# Altium PCB LXF1768.PcbDoc (part 3 of 5)
Units mil, origin at the board's own origin, x right, y up, seen from the top; angles counter-clockwise.
Board outline 3899 x 3079 mil, 2 copper layers (Top Layer, Bottom Layer); 52 components, 108 nets, 388 pads, 52 vias.
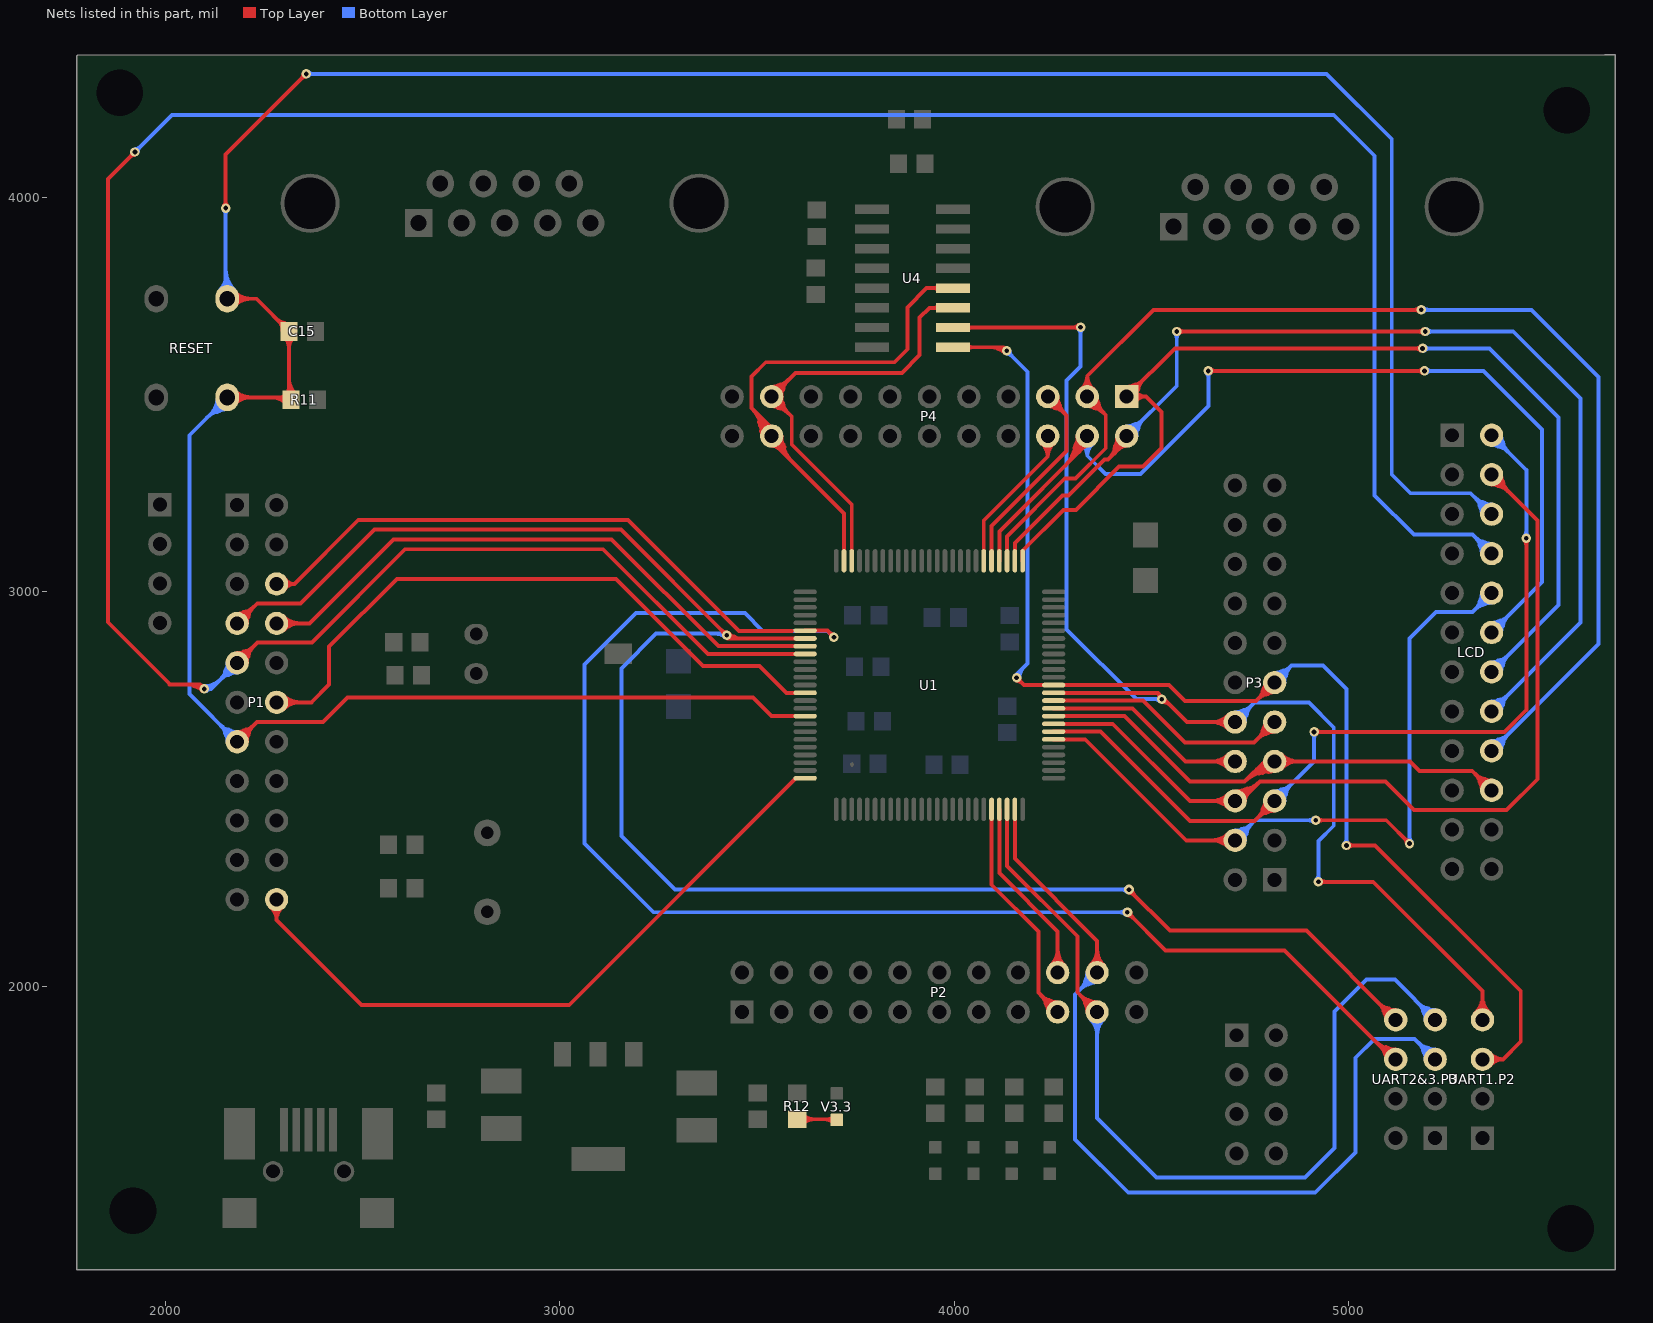
[diagram p3: the nets of this part, all layers, seen from the top]

## Via types
v1: diameter 25, hole 12, Top Layer to Bottom Layer, 27 vias
v2: diameter 24, hole 12, Top Layer to Bottom Layer, 25 vias

## Nets (pads, with @x,y where several pads share a name; then routed paths per layer and width w, separated by ;. In a path a pad name is that pad's centre, name@x,y a point inside that pad or via, vN(x,y) a via of type N, cw(c..) or ccw(c..) an arc to the next point about the centre after c; other vN are vias at no path point) (continued)
NetR12_2: R12.2 V3.3.1 | length 308.5
  Top Layer w10: R12.2@3602,1663.07 3700.46,1663.07 V3.3.1@3702,1661.54 ; 3644.17,1663.07 cw(c3644.17,1703.28) 3615.74,1674.85 ccw(c3644.17,1703.28) 3644.17,1663.07 ; 3644.17,1663.07 ccw(c3644.17,1622.87) 3615.74,1651.3 cw(c3644.17,1622.87) 3644.17,1663.07 ; 3672.34,1663.07 cw(c3672.34,1631.88) 3694.4,1653.94 ccw(c3672.34,1631.88) 3672.34,1663.07 ; 3679.76,1663.07 ccw(c3679.76,1683.78) 3694.4,1669.14 cw(c3679.76,1683.78) 3679.76,1663.07
NRST: C15.1 LCD.6 P1.13 R11.1 RESET.1 U1.17 | length 10827.2
  Top Layer w10: v2(2153,3973) 2153,4109 v2(2357,4313) ; RESET.1@2157,3493 2313,3493 C15.1@2313,3659 ; RESET.1@2157,3743 2231,3743 C15.1@2314,3660 ; P1.13@2176.64,2621.1 cw(c2214.3,2613.39) 2204.35,2650.52 ; P1.13@2182,2620 2232,2670 2400,2670 2462,2732 3490,2732 3536.96,2685.04 U1.17@3622,2685.04 ; P1.13@2183.1,2614.64 ccw(c2175.39,2652.3) 2212.52,2642.35 ; C15.1@2297.33,3683.09 cw(c2290.08,3656.06) C15.1@2317.25,3662.77 ; 2153,3989.9 cw(c2136.1,3989.9) 2148.05,3977.95 ccw(c2136.1,3989.9) 2153,3989.9 ; 2153,3989.9 ccw(c2169.9,3989.9) 2157.95,3977.95 cw(c2169.9,3989.9) 2153,3989.9 ; 2193.21,3493 cw(c2193.21,3529.21) 2167.61,3503.61 ccw(c2193.21,3529.21) 2193.21,3493 ; 2193.21,3493 ccw(c2193.21,3456.79) 2167.61,3482.39 cw(c2193.21,3456.79) 2193.21,3493 ; 2193.21,3743 cw(c2193.21,3779.21) 2167.61,3753.61 ccw(c2193.21,3779.21) 2193.21,3743 ; 2193.21,3743 ccw(c2193.21,3706.79) 2167.61,3732.39 cw(c2193.21,3706.79) 2193.21,3743 ; 2206.8,2644.8 cw(c2182,2669.6) 2182,2634.53 ccw(c2182,2669.6) 2206.8,2644.8 ; 2206.8,2644.8 ccw(c2231.6,2620) 2196.53,2620 cw(c2231.6,2620) 2206.8,2644.8 ; 2217.36,3493 cw(c2217.36,3553.36) 2174.68,3510.68 ccw(c2217.36,3553.36) 2217.36,3493 ; 2217.36,3493 ccw(c2217.36,3432.64) 2174.68,3475.32 cw(c2217.36,3432.64) 2217.36,3493 ; 2217.36,3743 cw(c2217.36,3803.36) 2174.68,3760.68 ccw(c2217.36,3803.36) 2217.36,3743 ; 2217.36,3743 ccw(c2217.36,3682.64) 2174.68,3725.32 cw(c2217.36,3682.64) 2217.36,3743 ; 2223.87,2661.87 cw(c2182,2703.74) 2182,2644.53 ccw(c2182,2703.74) 2223.87,2661.87 ; 2223.87,2661.87 ccw(c2265.74,2620) 2206.53,2620 cw(c2265.74,2620) 2223.87,2661.87 ; R11.1@2307.22,3500.74 cw(c2288.53,3519.44) 2288.53,3493 ccw(c2288.53,3519.44) R11.1@2307.22,3500.74 ; R11.1@2307.22,3500.74 ccw(c2293.28,3514.69) 2313,3514.69 cw(c2293.28,3514.69) R11.1@2307.22,3500.74 ; 2345.05,4301.05 cw(c2357,4289.1) 2357,4306 ccw(c2357,4289.1) 2345.05,4301.05 ; 2345.05,4301.05 ccw(c2333.1,4313) 2350,4313 cw(c2333.1,4313) 2345.05,4301.05 ; 2269.06,3493 cw(c2269.06,3439.03) 2307.22,3477.19 ccw(c2269.06,3439.03) 2269.06,3493 ; 2282.21,3691.79 ccw(c2314,3723.58) 2314,3678.62 cw(c2314,3723.58) 2282.21,3691.79 ; 2286.96,3687.04 cw(c2261.89,3661.97) 2297.35,3661.97 ccw(c2261.89,3661.97) 2286.96,3687.04 ; 2293.2,3493 cw(c2293.2,3463.17) 2314.3,3484.26 ccw(c2293.2,3463.17) 2293.2,3493 ; C15.1@2302.22,3646.26 cw(c2276.21,3620.24) 2313,3620.24 ccw(c2276.21,3620.24) C15.1@2302.22,3646.26 ; 2313,3519.52 ccw(c2349.55,3519.52) 2323.7,3493.67 cw(c2349.55,3519.52) 2313,3519.52 ; 2313,3543.66 ccw(c2373.69,3543.66) 2330.78,3500.74 cw(c2373.69,3543.66) 2313,3543.66 ; 2313,3615.41 cw(c2356.62,3615.41) 2325.78,3646.26 ccw(c2356.62,3615.41) 2313,3615.41
  Bottom Layer w10: 2126.28,3466.67 cw(c2160.92,3457.39) RESET.1@2156.36,3492.96 ; 2130.97,3456.02 ccw(c2119.65,3498.27) RESET.1@2161.82,3486.67 ; 2151.48,2642.35 ccw(c2188.61,2652.3) P1.13@2180.9,2614.64 ; v2(2153,3973) 2153,3747 RESET.1@2157,3743 ; RESET.1@2157,3493 2061,3397 2061,2741 P1.13@2182,2620 ; 2159.65,2650.52 cw(c2149.7,2613.39) P1.13@2187.36,2621.1 ; v2(2357,4313) 4944,4313 5109,4148 5109,3298 5157,3250 5309,3250 LCD.6@5362,3197 ; 5331.48,3219.35 ccw(c5368.61,3229.3) LCD.6@5360.9,3191.64 ; 5339.65,3227.52 cw(c5329.7,3190.39) LCD.6@5367.36,3198.1 ; 2140.13,2661.87 cw(c2098.26,2620) 2157.47,2620 ccw(c2098.26,2620) 2140.13,2661.87 ; 2140.13,2661.87 ccw(c2182,2703.74) 2182,2644.53 cw(c2182,2703.74) 2140.13,2661.87 ; 2153,3956.1 cw(c2169.9,3956.1) 2157.95,3968.05 ccw(c2169.9,3956.1) 2153,3956.1 ; 2153,3956.1 ccw(c2136.1,3956.1) 2148.05,3968.05 cw(c2136.1,3956.1) 2153,3956.1 ; 2157.2,2644.8 cw(c2132.4,2620) 2167.47,2620 ccw(c2132.4,2620) 2157.2,2644.8 ; 2157.2,2644.8 ccw(c2182,2669.6) 2182,2634.53 cw(c2182,2669.6) 2157.2,2644.8 ; 2373.9,4313 cw(c2373.9,4329.9) 2361.95,4317.95 ccw(c2373.9,4329.9) 2373.9,4313 ; 2373.9,4313 ccw(c2373.9,4296.1) 2361.95,4308.05 cw(c2373.9,4296.1) 2373.9,4313 ; 5320.13,3238.87 cw(c5278.26,3197) 5337.47,3197 ccw(c5278.26,3197) 5320.13,3238.87 ; 5320.13,3238.87 ccw(c5362,3280.74) 5362,3221.53 cw(c5362,3280.74) 5320.13,3238.87 ; 5337.2,3221.8 cw(c5312.4,3197) 5347.47,3197 ccw(c5312.4,3197) 5337.2,3221.8 ; 5337.2,3221.8 ccw(c5362,3246.6) 5362,3211.53 cw(c5362,3246.6) 5337.2,3221.8 ; 2105.79,3441.79 cw(c2157,3390.57) 2157,3463 ccw(c2157,3390.57) 2105.79,3441.79 ; 2117.86,3453.86 ccw(c2083.72,3488) 2132,3488 cw(c2083.72,3488) 2117.86,3453.86 ; 2122.86,3458.86 cw(c2157,3424.72) 2157,3473 ccw(c2157,3424.72) 2122.86,3458.86 ; RESET.1@2139.32,3765.68 ccw(c2106.3,3798.7) 2153,3798.7 cw(c2106.3,3798.7) RESET.1@2139.32,3765.68 ; 2153,3793.87 ccw(c2202.87,3793.87) 2167.61,3758.61 cw(c2202.87,3793.87) 2153,3793.87 ; 2153,3818.01 ccw(c2227.01,3818.01) 2174.68,3765.68 cw(c2227.01,3818.01) 2153,3818.01
NRSTOUT: P1.12 U1.14 | length 1941.8
  Top Layer w10: P1.12@2282,2720 2370,2720 2415,2765 2415,2861 2587,3033 3142,3033 3363,2812 3506.32,2812 3574.23,2744.09 U1.14@3622,2744.09 ; 2317.07,2720 cw(c2317.07,2755.07) 2292.27,2730.27 ccw(c2317.07,2755.07) 2317.07,2720 ; 2317.07,2720 ccw(c2317.07,2684.93) 2292.27,2709.73 cw(c2317.07,2684.93) 2317.07,2720 ; 2341.21,2720 cw(c2341.21,2779.21) 2299.34,2737.34 ccw(c2341.21,2779.21) 2341.21,2720 ; 2341.21,2720 ccw(c2341.21,2660.79) 2299.34,2702.66 cw(c2341.21,2660.79) 2341.21,2720
P0_0: P2.17 U1.46 | length 964.5
  Top Layer w10: U1.46@4094.44,2448.82 4094.44,2257.56 4213,2139 4213,1984 P2.17@4262,1935 ; 4231.48,1957.35 ccw(c4268.61,1967.3) P2.17@4260.9,1929.64 ; 4239.65,1965.52 cw(c4229.7,1928.39) P2.17@4267.36,1936.1 ; 4220.13,1976.87 cw(c4178.26,1935) 4237.47,1935 ccw(c4178.26,1935) 4220.13,1976.87 ; 4220.13,1976.87 ccw(c4262,2018.74) 4262,1959.53 cw(c4262,2018.74) 4220.13,1976.87 ; 4237.2,1959.8 cw(c4212.4,1935) 4247.47,1935 ccw(c4212.4,1935) 4237.2,1959.8 ; 4237.2,1959.8 ccw(c4262,1984.6) 4262,1949.53 cw(c4262,1984.6) 4237.2,1959.8
P0_1: P2.18 U1.47 | length 771.3
  Top Layer w10: U1.47@4114.12,2448.82 4114.12,2286.88 4262,2139 P2.18@4262,2035 ; 4262,2070.07 cw(c4226.93,2070.07) 4251.73,2045.27 ccw(c4226.93,2070.07) 4262,2070.07 ; 4262,2070.07 ccw(c4297.07,2070.07) 4272.27,2045.27 cw(c4297.07,2070.07) 4262,2070.07 ; 4262,2094.21 cw(c4202.79,2094.21) 4244.66,2052.34 ccw(c4202.79,2094.21) 4262,2094.21 ; 4262,2094.21 ccw(c4321.21,2094.21) 4279.34,2052.34 cw(c4321.21,2094.21) 4262,2094.21
P0_2: P4.19 U1.98 U4.11 | length 1922.9
  Top Layer w10: P4.19@3531.64,3493.9 ccw(c3569.3,3501.61) 3559.35,3464.48 ; P4.19@3531.64,3496.1 cw(c3569.3,3488.39) 3559.35,3525.52 ; P4.19@3538.1,3489.64 ccw(c3530.39,3527.3) 3567.52,3517.35 ; P4.19@3538.1,3500.36 cw(c3530.39,3462.7) 3567.52,3472.65 ; U1.98@3740.11,3078.74 3740.11,3221.89 3588,3374 3588,3444 P4.19@3537,3495 3597,3555 3867,3555 3912,3600 3912,3695 3937,3720 U4.11@3996.36,3720 ; P4.19@3551.53,3495 cw(c3586.6,3495) 3561.8,3519.8 ; P4.19@3551.53,3495 ccw(c3586.6,3495) 3561.8,3470.2 ; P4.19@3551.53,3495 cw(c3586.6,3495) 3561.8,3519.8 ; P4.19@3551.53,3495 ccw(c3586.6,3495) 3561.8,3470.2 ; P4.19@3561.53,3495 cw(c3620.74,3495) 3578.87,3536.87 ; P4.19@3561.53,3495 ccw(c3620.74,3495) 3578.87,3453.13 ; P4.19@3561.53,3495 cw(c3620.74,3495) 3578.87,3536.87 ; P4.19@3561.53,3495 ccw(c3620.74,3495) 3578.87,3453.13 ; 3561.8,3470.2 ccw(c3537,3445.4) 3537,3480.47 cw(c3537,3445.4) 3561.8,3470.2 ; 3561.8,3519.8 cw(c3537,3544.6) 3537,3509.53 ccw(c3537,3544.6) 3561.8,3519.8 ; 3578.87,3453.13 ccw(c3537,3411.26) 3537,3470.47 cw(c3537,3411.26) 3578.87,3453.13 ; 3578.87,3536.87 cw(c3537,3578.74) 3537,3519.53 ccw(c3537,3578.74) 3578.87,3536.87 ; 3948.42,3720 cw(c3948.42,3703.56) 3960.05,3715.18 ccw(c3948.42,3703.56) 3948.42,3720 ; 3948.42,3720 ccw(c3948.42,3736.44) 3960.05,3724.82 cw(c3948.42,3736.44) 3948.42,3720
P0_3: P4.20 U1.99 U4.12 | length 2297.4
  Top Layer w10: 3505.51,3430.21 ccw(c3564.67,3442.47) P4.20@3534.24,3390.27 ; 3510.06,3408.25 ccw(c3549.48,3416.42) P4.20@3529.21,3381.63 ; 3516.13,3426.55 ccw(c3553.34,3434.26) P4.20@3538.74,3399.18 ; P4.20@3531.53,3395.09 ccw(c3561.06,3394.61) 3553.42,3366.07 ; P4.20@3535.39,3390.77 cw(c3512.81,3331.4) 3574.16,3347.84 ; P4.20@3536.09,3390.57 cw(c3530.22,3362.06) 3558.34,3369.59 ; P4.20@3538.95,3400.12 cw(c3521.38,3353.94) 3569.1,3366.72 ; U1.99@3720.43,3078.74 3720.43,3198.57 3537,3382 P4.20@3537,3395 3537,3415 3486,3466 ; U4.12@3996.36,3770 3930,3770 3881,3721 3881,3615 3848,3582 3522,3582 3486,3546 3486,3466 ; 3486,3466 cw(c3421.64,3401.63) 3512.51,3396.41 ccw(c3421.64,3401.63) 3486,3466 ; 3948.42,3770 cw(c3948.42,3753.56) 3960.05,3765.18 ccw(c3948.42,3753.56) 3948.42,3770 ; 3948.42,3770 ccw(c3948.42,3786.44) 3960.05,3774.82 cw(c3948.42,3786.44) 3948.42,3770 ; 3501.78,3450.22 cw(c3451.47,3399.92) 3522.5,3395.83 ccw(c3451.47,3399.92) 3501.78,3450.22 ; 3517.55,3434.45 cw(c3481.3,3398.2) 3532.48,3395.26 ccw(c3481.3,3398.2) 3517.55,3434.45 ; P4.20@3537,3370.47 cw(c3537,3342.64) 3556.68,3362.32 ccw(c3537,3342.64) P4.20@3537,3370.47 ; P4.20@3541.53,3395 ccw(c3583.84,3395) 3553.92,3365.08 cw(c3583.84,3395) P4.20@3541.53,3395 ; P4.20@3551.53,3395 ccw(c3617.98,3395) 3570.99,3348.01 cw(c3617.98,3395) P4.20@3551.53,3395 ; P4.20@3561.53,3395 ccw(c3652.13,3395) 3588.06,3330.94 cw(c3652.13,3395) P4.20@3561.53,3395
P0_4: P4.6 U1.81 | length 624.1
  Top Layer w10: U1.81@4074.76,3078.74 4074.76,3180.76 4237,3343 ; P4.6@4237,3395 4237,3343 ; 4237,3343 cw(c4279.85,3343) 4252.6,3376.07 ccw(c4279.85,3343) 4237,3343 ; 4237,3343 ccw(c4194.15,3343) 4221.4,3376.07 cw(c4194.15,3343) 4237,3343 ; 4237,3364.2 cw(c4262.38,3364.2) 4246.24,3383.79 ccw(c4262.38,3364.2) 4237,3364.2 ; 4237,3364.2 ccw(c4211.62,3364.2) 4227.76,3383.79 cw(c4211.62,3364.2) 4237,3364.2
P0_5: P4.5 U1.80 | length 896.4
  Top Layer w10: U1.80@4094.44,3078.74 4094.44,3166.44 4285,3357 4285,3447 P4.5@4237,3495 ; P4.5@4231.64,3493.9 ccw(c4269.3,3501.61) 4259.35,3464.48 ; P4.5@4238.1,3500.36 cw(c4230.39,3462.7) 4267.52,3472.65 ; 4261.8,3470.2 cw(c4286.6,3495) 4251.53,3495 ccw(c4286.6,3495) 4261.8,3470.2 ; 4261.8,3470.2 ccw(c4237,3445.4) 4237,3480.47 cw(c4237,3445.4) 4261.8,3470.2 ; 4278.87,3453.13 cw(c4320.74,3495) 4261.53,3495 ccw(c4320.74,3495) 4278.87,3453.13 ; 4278.87,3453.13 ccw(c4237,3411.26) 4237,3470.47 cw(c4237,3411.26) 4278.87,3453.13
P0_6: LCD.12 P4.4 U1.79 | length 3789.6
  Top Layer w10: U1.79@4114.12,3078.74 4114.12,3153.12 4337,3376 P4.4@4337,3395 ; 4298.7,3343.6 cw(c4368.67,3324.85) P4.4@4338.86,3390.87 ; 4304.16,3363.99 cw(c4357.45,3349.71) P4.4@4334.75,3399.99 ; 4314.73,3366.11 cw(c4348.83,3356.97) P4.4@4338.34,3390.68 ; v2(4644,3560) v2(5192,3560) ; 4660.9,3560 cw(c4660.9,3576.9) 4648.95,3564.95 ccw(c4660.9,3576.9) 4660.9,3560 ; 4660.9,3560 ccw(c4660.9,3543.1) 4648.95,3555.05 cw(c4660.9,3543.1) 4660.9,3560 ; 5175.1,3560 cw(c5175.1,3543.1) 5187.05,3555.05 ccw(c5175.1,3543.1) 5175.1,3560 ; 5175.1,3560 ccw(c5175.1,3576.9) 5187.05,3564.95 cw(c5175.1,3576.9) 5175.1,3560 ; 4281.69,3320.69 ccw(c4207.39,3395) 4312.47,3395 cw(c4207.39,3395) 4281.69,3320.69 ; 4298.76,3337.77 ccw(c4241.53,3395) 4322.47,3395 cw(c4241.53,3395) 4298.76,3337.77 ; 4315.84,3354.84 ccw(c4275.67,3395) 4332.47,3395 cw(c4275.67,3395) 4315.84,3354.84 ; 4327.56,3366.56 cw(c4337,3357.13) 4337,3370.47 ccw(c4337,3357.13) 4327.56,3366.56
  Bottom Layer w10: P4.4@4337,3395 4337,3345 ; v2(4644,3560) 4644,3471 4472,3299 4383,3299 4337,3345 ; v2(5192,3560) 5342,3560 5490,3412 5490,3025 LCD.12@5362,2897 ; LCD.12@5356.64,2898.1 cw(c5394.3,2890.39) 5384.35,2927.52 ; LCD.12@5363.1,2891.64 ccw(c5355.39,2929.3) 5392.52,2919.35 ; 4337,3345 cw(c4375.69,3345) 4352.01,3375.6 ccw(c4375.69,3345) 4337,3345 ; 4337,3345 ccw(c4298.31,3345) 4321.99,3375.6 cw(c4298.31,3345) 4337,3345 ; 4337,3365.39 cw(c4359.92,3365.39) 4345.89,3383.51 ccw(c4359.92,3365.39) 4337,3365.39 ; 4337,3365.39 ccw(c4314.08,3365.39) 4328.11,3383.51 cw(c4314.08,3365.39) 4337,3365.39 ; 4644,3543.1 cw(c4660.9,3543.1) 4648.95,3555.05 ccw(c4660.9,3543.1) 4644,3543.1 ; 4644,3543.1 ccw(c4627.1,3543.1) 4639.05,3555.05 cw(c4627.1,3543.1) 4644,3543.1 ; 5208.9,3560 cw(c5208.9,3576.9) 5196.95,3564.95 ccw(c5208.9,3576.9) 5208.9,3560 ; 5208.9,3560 ccw(c5208.9,3543.1) 5196.95,3555.05 cw(c5208.9,3543.1) 5208.9,3560 ; 5386.8,2921.8 cw(c5362,2946.6) 5362,2911.53 ccw(c5362,2946.6) 5386.8,2921.8 ; 5386.8,2921.8 ccw(c5411.6,2897) 5376.53,2897 cw(c5411.6,2897) 5386.8,2921.8 ; 5403.87,2938.87 cw(c5362,2980.74) 5362,2921.53 ccw(c5362,2980.74) 5403.87,2938.87 ; 5403.87,2938.87 ccw(c5445.74,2897) 5386.53,2897 cw(c5445.74,2897) 5403.87,2938.87
P0_7: LCD.18 P4.3 U1.78 | length 4212.8
  Top Layer w10: U1.78@4133.81,3078.74 4133.81,3140.81 4280,3287 4307,3287 4384,3364 4384,3448 P4.3@4337,3495 4337,3547 ; P4.3@4331.64,3493.9 ccw(c4369.3,3501.61) 4359.35,3464.48 ; P4.3@4338.1,3500.36 cw(c4330.39,3462.7) 4367.52,3472.65 ; v2(5184,3715) 4505,3715 4337,3547 ; 4337,3525.8 cw(c4311.62,3525.8) 4327.76,3506.21 ccw(c4311.62,3525.8) 4337,3525.8 ; 4337,3525.8 ccw(c4362.38,3525.8) 4346.24,3506.21 cw(c4362.38,3525.8) 4337,3525.8 ; 4337,3547 cw(c4294.15,3547) 4321.4,3513.93 ccw(c4294.15,3547) 4337,3547 ; 4337,3547 ccw(c4379.85,3547) 4352.6,3513.93 cw(c4379.85,3547) 4337,3547 ; 4361.8,3470.2 cw(c4386.6,3495) 4351.53,3495 ccw(c4386.6,3495) 4361.8,3470.2 ; 4361.8,3470.2 ccw(c4337,3445.4) 4337,3480.47 cw(c4337,3445.4) 4361.8,3470.2 ; 4378.87,3453.13 cw(c4420.74,3495) 4361.53,3495 ccw(c4420.74,3495) 4378.87,3453.13 ; 4378.87,3453.13 ccw(c4337,3411.26) 4337,3470.47 cw(c4337,3411.26) 4378.87,3453.13 ; 5167.1,3715 cw(c5167.1,3698.1) 5179.05,3710.05 ccw(c5167.1,3698.1) 5167.1,3715 ; 5167.1,3715 ccw(c5167.1,3731.9) 5179.05,3719.95 cw(c5167.1,3731.9) 5167.1,3715
  Bottom Layer w10: v2(5184,3715) 5463,3715 5633,3545 5633,2868 LCD.18@5362,2597 ; LCD.18@5356.64,2598.1 cw(c5394.3,2590.39) 5384.35,2627.52 ; LCD.18@5363.1,2591.64 ccw(c5355.39,2629.3) 5392.52,2619.35 ; 5200.9,3715 cw(c5200.9,3731.9) 5188.95,3719.95 ccw(c5200.9,3731.9) 5200.9,3715 ; 5200.9,3715 ccw(c5200.9,3698.1) 5188.95,3710.05 cw(c5200.9,3698.1) 5200.9,3715 ; 5386.8,2621.8 cw(c5362,2646.6) 5362,2611.53 ccw(c5362,2646.6) 5386.8,2621.8 ; 5386.8,2621.8 ccw(c5411.6,2597) 5376.53,2597 cw(c5411.6,2597) 5386.8,2621.8 ; 5403.87,2638.87 cw(c5362,2680.74) 5362,2621.53 ccw(c5362,2680.74) 5403.87,2638.87 ; 5403.87,2638.87 ccw(c5445.74,2597) 5386.53,2597 cw(c5445.74,2597) 5403.87,2638.87
P0_8: LCD.16 P4.2 U1.77 | length 4171.9
  Top Layer w10: U1.77@4153.49,3078.74 4153.49,3123.49 4274,3244 4289.96,3244 4380.96,3335 4390,3335 ; 4406.02,3363.04 cw(c4458.42,3351.94) P4.2@4434.56,3399.9 ; 4416.8,3367.33 cw(c4447.19,3360.9) P4.2@4438.3,3390.66 ; 4420.58,3366.07 ccw(c4412.94,3394.61) P4.2@4442.47,3395.09 ; P4.2@4437,3395 4437,3382 4390,3335 ; v2(4564,3660) v2(5194,3660) ; 4390,3335 ccw(c4335.41,3389.6) 4412.51,3393.7 cw(c4335.41,3389.6) 4390,3335 ; 4580.9,3660 cw(c4580.9,3676.9) 4568.95,3664.95 ccw(c4580.9,3676.9) 4580.9,3660 ; 4580.9,3660 ccw(c4580.9,3643.1) 4568.95,3655.05 cw(c4580.9,3643.1) 4580.9,3660 ; 5177.1,3660 cw(c5177.1,3643.1) 5189.05,3655.05 ccw(c5177.1,3643.1) 5177.1,3660 ; 5177.1,3660 ccw(c5177.1,3676.9) 5189.05,3664.95 cw(c5177.1,3676.9) 5177.1,3660 ; 4405.87,3350.87 ccw(c4365.54,3391.2) 4422.49,3394.23 cw(c4365.54,3391.2) 4405.87,3350.87 ; 4417.32,3362.32 cw(c4437,3342.64) 4437,3370.47 ccw(c4437,3342.64) 4417.32,3362.32 ; 4421.73,3366.73 ccw(c4395.67,3392.8) 4432.48,3394.76 cw(c4395.67,3392.8) 4421.73,3366.73
  Bottom Layer w10: P4.2@4431.64,3396.1 cw(c4469.3,3388.39) 4459.35,3425.52 ; P4.2@4437,3395 4564,3522 v2(4564,3660) ; P4.2@4438.1,3389.64 ccw(c4430.39,3427.3) 4467.52,3417.35 ; v2(5194,3660) 5417,3660 5587,3490 5587,2922 LCD.16@5362,2697 ; LCD.16@5356.64,2698.1 cw(c5394.3,2690.39) 5384.35,2727.52 ; LCD.16@5363.1,2691.64 ccw(c5355.39,2729.3) 5392.52,2719.35 ; 4461.8,3419.8 cw(c4437,3444.6) 4437,3409.53 ccw(c4437,3444.6) 4461.8,3419.8 ; 4461.8,3419.8 ccw(c4486.6,3395) 4451.53,3395 cw(c4486.6,3395) 4461.8,3419.8 ; 4478.87,3436.87 cw(c4437,3478.74) 4437,3419.53 ccw(c4437,3478.74) 4478.87,3436.87 ; 4478.87,3436.87 ccw(c4520.74,3395) 4461.53,3395 cw(c4520.74,3395) 4478.87,3436.87 ; 4564,3643.1 cw(c4580.9,3643.1) 4568.95,3655.05 ccw(c4580.9,3643.1) 4564,3643.1 ; 4564,3643.1 ccw(c4547.1,3643.1) 4559.05,3655.05 cw(c4547.1,3643.1) 4564,3643.1 ; 5210.9,3660 cw(c5210.9,3676.9) 5198.95,3664.95 ccw(c5210.9,3676.9) 5210.9,3660 ; 5210.9,3660 ccw(c5210.9,3643.1) 5198.95,3655.05 cw(c5210.9,3643.1) 5210.9,3660 ; 5386.8,2721.8 cw(c5362,2746.6) 5362,2711.53 ccw(c5362,2746.6) 5386.8,2721.8 ; 5386.8,2721.8 ccw(c5411.6,2697) 5376.53,2697 cw(c5411.6,2697) 5386.8,2721.8 ; 5403.87,2738.87 cw(c5362,2780.74) 5362,2721.53 ccw(c5362,2780.74) 5403.87,2738.87 ; 5403.87,2738.87 ccw(c5445.74,2697) 5386.53,2697 cw(c5445.74,2697) 5403.87,2738.87
P0_9: LCD.14 P4.1 U1.76 | length 3618.9
  Top Layer w10: U1.76@4173.18,3078.74 4173.18,3104.18 4277,3208 4308,3208 4418,3318 4478,3318 4525,3365 4525,3456 4486,3495 ; P4.1@4431.64,3496.1 cw(c4469.3,3488.39) 4459.35,3525.52 ; P4.1@4438.1,3489.64 ccw(c4430.39,3527.3) 4467.52,3517.35 ; v2(5187,3617) 4559,3617 P4.1@4437,3495 4486,3495 ; P4.1@4461.8,3519.8 cw(c4437,3544.6) 4437,3509.53 ccw(c4437,3544.6) P4.1@4461.8,3519.8 ; P4.1@4461.8,3519.8 ccw(c4486.6,3495) 4451.53,3495 cw(c4486.6,3495) P4.1@4461.8,3519.8 ; 4478.87,3536.87 cw(c4437,3578.74) 4437,3519.53 ccw(c4437,3578.74) 4478.87,3536.87 ; 4478.87,3536.87 ccw(c4520.74,3495) 4461.53,3495 cw(c4520.74,3495) 4478.87,3536.87 ; 4486,3495 cw(c4486,3531.68) 4456.64,3509.7 ccw(c4486,3531.68) 4486,3495 ; 4486,3495 ccw(c4486,3458.32) 4456.64,3480.3 cw(c4486,3458.32) 4486,3495 ; 5170.1,3617 cw(c5170.1,3600.1) 5182.05,3612.05 ccw(c5170.1,3600.1) 5170.1,3617 ; 5170.1,3617 ccw(c5170.1,3633.9) 5182.05,3621.95 cw(c5170.1,3633.9) 5170.1,3617
  Bottom Layer w10: v2(5187,3617) 5357,3617 5532,3442 5532,2967 LCD.14@5362,2797 ; LCD.14@5356.64,2798.1 cw(c5394.3,2790.39) 5384.35,2827.52 ; LCD.14@5363.1,2791.64 ccw(c5355.39,2829.3) 5392.52,2819.35 ; 5203.9,3617 cw(c5203.9,3633.9) 5191.95,3621.95 ccw(c5203.9,3633.9) 5203.9,3617 ; 5203.9,3617 ccw(c5203.9,3600.1) 5191.95,3612.05 cw(c5203.9,3600.1) 5203.9,3617 ; 5386.8,2821.8 cw(c5362,2846.6) 5362,2811.53 ccw(c5362,2846.6) 5386.8,2821.8 ; 5386.8,2821.8 ccw(c5411.6,2797) 5376.53,2797 cw(c5411.6,2797) 5386.8,2821.8 ; 5403.87,2838.87 cw(c5362,2880.74) 5362,2821.53 ccw(c5362,2880.74) 5403.87,2838.87 ; 5403.87,2838.87 ccw(c5445.74,2797) 5386.53,2797 cw(c5445.74,2797) 5403.87,2838.87
P0_10: P2.19 U1.48 UART2&3.P3.7 | length 3308.6
  Top Layer w10: U1.48@4133.81,2448.82 4133.81,2305.19 4312,2127 4312,1985 P2.19@4362,1935 ; 4331.48,1957.35 ccw(c4368.61,1967.3) P2.19@4360.9,1929.64 ; 4339.65,1965.52 cw(c4329.7,1928.39) P2.19@4367.36,1936.1 ; 4320.13,1976.87 cw(c4278.26,1935) 4337.47,1935 ccw(c4278.26,1935) 4320.13,1976.87 ; 4320.13,1976.87 ccw(c4362,2018.74) 4362,1959.53 cw(c4362,2018.74) 4320.13,1976.87 ; 4337.2,1959.8 cw(c4312.4,1935) 4347.47,1935 ccw(c4312.4,1935) 4337.2,1959.8 ; 4337.2,1959.8 ccw(c4362,1984.6) 4362,1949.53 cw(c4362,1984.6) 4337.2,1959.8
  Bottom Layer w10: P2.19@4362,1935 4362,1666 4513,1515 4889,1515 4964,1590 4964,1936 5045,2017 5117,2017 UART2&3.P3.7@5219,1915 ; 5188.48,1937.35 ccw(c5225.61,1947.3) UART2&3.P3.7@5217.9,1909.64 ; 5196.65,1945.52 cw(c5186.7,1908.39) UART2&3.P3.7@5224.36,1916.1 ; 4362,1875.79 cw(c4421.21,1875.79) 4379.34,1917.66 ccw(c4421.21,1875.79) 4362,1875.79 ; 4362,1875.79 ccw(c4302.79,1875.79) 4344.66,1917.66 cw(c4302.79,1875.79) 4362,1875.79 ; 4362,1899.93 cw(c4397.07,1899.93) 4372.27,1924.73 ccw(c4397.07,1899.93) 4362,1899.93 ; 4362,1899.93 ccw(c4326.93,1899.93) 4351.73,1924.73 cw(c4326.93,1899.93) 4362,1899.93 ; 5177.13,1956.87 cw(c5135.26,1915) 5194.47,1915 ccw(c5135.26,1915) 5177.13,1956.87 ; 5177.13,1956.87 ccw(c5219,1998.74) 5219,1939.53 cw(c5219,1998.74) 5177.13,1956.87 ; 5194.2,1939.8 cw(c5169.4,1915) 5204.47,1915 ccw(c5169.4,1915) 5194.2,1939.8 ; 5194.2,1939.8 ccw(c5219,1964.6) 5219,1929.53 cw(c5219,1964.6) 5194.2,1939.8
P0_11: P2.20 U1.49 UART2&3.P3.5 | length 3297.8
  Top Layer w10: U1.49@4153.49,2448.82 4153.49,2323.51 4362,2115 P2.20@4362,2035 ; 4362,2070.07 cw(c4326.93,2070.07) 4351.73,2045.27 ccw(c4326.93,2070.07) 4362,2070.07 ; 4362,2070.07 ccw(c4397.07,2070.07) 4372.27,2045.27 cw(c4397.07,2070.07) 4362,2070.07 ; 4362,2094.21 cw(c4302.79,2094.21) 4344.66,2052.34 ccw(c4302.79,2094.21) 4362,2094.21 ; 4362,2094.21 ccw(c4421.21,2094.21) 4379.34,2052.34 cw(c4421.21,2094.21) 4362,2094.21
  Bottom Layer w10: 4331.48,2012.65 cw(c4368.61,2002.7) P2.20@4360.9,2040.36 ; 4339.65,2004.48 ccw(c4329.7,2041.61) P2.20@4367.36,2033.9 ; P2.20@4362,2035 4306,1979 4306,1612 4441,1477 4915,1477 5017,1579 5017,1819 5065,1867 5167,1867 UART2&3.P3.5@5219,1815 ; 5188.48,1837.35 ccw(c5225.61,1847.3) UART2&3.P3.5@5217.9,1809.64 ; 5196.65,1845.52 cw(c5186.7,1808.39) UART2&3.P3.5@5224.36,1816.1 ; 4320.13,1993.13 cw(c4362,1951.26) 4362,2010.47 ccw(c4362,1951.26) 4320.13,1993.13 ; 4320.13,1993.13 ccw(c4278.26,2035) 4337.47,2035 cw(c4278.26,2035) 4320.13,1993.13 ; 4337.2,2010.2 cw(c4362,1985.4) 4362,2020.47 ccw(c4362,1985.4) 4337.2,2010.2 ; 4337.2,2010.2 ccw(c4312.4,2035) 4347.47,2035 cw(c4312.4,2035) 4337.2,2010.2 ; 5177.13,1856.87 cw(c5135.26,1815) 5194.47,1815 ccw(c5135.26,1815) 5177.13,1856.87 ; 5177.13,1856.87 ccw(c5219,1898.74) 5219,1839.53 cw(c5219,1898.74) 5177.13,1856.87 ; 5194.2,1839.8 cw(c5169.4,1815) 5204.47,1815 ccw(c5169.4,1815) 5194.2,1839.8 ; 5194.2,1839.8 ccw(c5219,1864.6) 5219,1829.53 cw(c5219,1864.6) 5194.2,1839.8
P0_15: P3.10 U1.62 U4.10 UART1.P2.4 | length 4587.7
  Top Layer w10: U4.10@3996.36,3670 v2@4319,3670 ; U1.62@4251.92,2744.09 4515.9,2744.09 ; v2(4526,2728) 4526,2734 4515.9,2744.09 ; v2@4529,2731 4590,2670 P3.10@4712,2670 ; v2(4923,2265) 5062,2265 5339,1988 UART1.P2.4@5339,1915 ; 4044.3,3670 cw(c4044.3,3686.44) 4032.67,3674.82 ccw(c4044.3,3686.44) 4044.3,3670 ; 4044.3,3670 ccw(c4044.3,3653.56) 4032.67,3665.18 cw(c4044.3,3653.56) 4044.3,3670 ; 4515.91,2744.09 cw(c4506.1,2734.28) 4519.32,2730.11 ccw(c4506.1,2734.28) 4515.91,2744.09 ; 4652.79,2670 cw(c4652.79,2610.79) 4694.66,2652.66 ccw(c4652.79,2610.79) 4652.79,2670 ; 4652.79,2670 ccw(c4652.79,2729.21) 4694.66,2687.34 cw(c4652.79,2729.21) 4652.79,2670 ; 4676.93,2670 cw(c4676.93,2634.93) 4701.73,2659.73 ccw(c4676.93,2634.93) 4676.93,2670 ; 4676.93,2670 ccw(c4676.93,2705.07) 4701.73,2680.27 cw(c4676.93,2705.07) 4676.93,2670 ; 4939.9,2265 cw(c4939.9,2281.9) 4927.95,2269.95 ccw(c4939.9,2281.9) 4939.9,2265 ; 4939.9,2265 ccw(c4939.9,2248.1) 4927.95,2260.05 cw(c4939.9,2248.1) 4939.9,2265 ; 5339,1950.07 cw(c5303.93,1950.07) 5328.73,1925.27 ccw(c5303.93,1950.07) 5339,1950.07 ; 5339,1950.07 ccw(c5374.07,1950.07) 5349.27,1925.27 cw(c5374.07,1950.07) 5339,1950.07 ; 5339,1974.21 cw(c5279.79,1974.21) 5321.66,1932.34 ccw(c5279.79,1974.21) 5339,1974.21 ; 5339,1974.21 ccw(c5398.21,1974.21) 5356.34,1932.34 cw(c5398.21,1974.21) 5339,1974.21 ; 4300.69,3670 ccw(c4300.69,3690.31) 4315.05,3675.95 cw(c4300.69,3690.31) 4300.69,3670 ; 4305.51,3670 cw(c4305.51,3656.51) 4315.05,3666.05 ccw(c4305.51,3656.51) 4305.51,3670 ; v2@4526,2721 cw(c4526,2689.62) 4548.19,2711.81 ccw(c4526,2689.62) v2@4526,2721
  Bottom Layer w10: v2(4320,3671) 4320,3571 4285,3536 4285,2905 4462,2728 v2(4526,2728) ; P3.10@4706.64,2671.1 cw(c4744.3,2663.39) 4734.35,2700.52 ; P3.10@4712,2670 4761,2719 4899,2719 4962,2656 4962,2407 4923,2368 v2(4923,2265) ; P3.10@4713.1,2664.64 ccw(c4705.39,2702.3) 4742.52,2692.35 ; 4320,3654.1 cw(c4336.9,3654.1) 4324.95,3666.05 ccw(c4336.9,3654.1) 4320,3654.1 ; 4320,3654.1 ccw(c4303.1,3654.1) 4315.05,3666.05 cw(c4303.1,3654.1) 4320,3654.1 ; 4509.1,2728 cw(c4509.1,2711.1) 4521.05,2723.05 ccw(c4509.1,2711.1) 4509.1,2728 ; 4509.1,2728 ccw(c4509.1,2744.9) 4521.05,2732.95 cw(c4509.1,2744.9) 4509.1,2728 ; 4736.8,2694.8 cw(c4712,2719.6) 4712,2684.53 ccw(c4712,2719.6) 4736.8,2694.8 ; 4736.8,2694.8 ccw(c4761.6,2670) 4726.53,2670 cw(c4761.6,2670) 4736.8,2694.8 ; 4753.87,2711.87 cw(c4712,2753.74) 4712,2694.53 ccw(c4712,2753.74) 4753.87,2711.87 ; 4753.87,2711.87 ccw(c4795.74,2670) 4736.53,2670 cw(c4795.74,2670) 4753.87,2711.87 ; 4923,2281.9 cw(c4906.1,2281.9) 4918.05,2269.95 ccw(c4906.1,2281.9) 4923,2281.9 ; 4923,2281.9 ccw(c4939.9,2281.9) 4927.95,2269.95 cw(c4939.9,2281.9) 4923,2281.9
P0_16: P3.11 U1.63 U4.9 UART1.P2.3 | length 4649
  Top Layer w10: U4.9@3996.36,3620 4124,3620 ; 4110.08,3616.42 ccw(c4119.27,3632.34) v2@4129.21,3616.89 ; v2(4133,3611) 4124,3620 ; v2(4158,2782) 4176.22,2763.78 U1.63@4251.92,2763.78 4544.22,2763.78 4585,2723 4765,2723 P3.11@4812,2770 ; 4781.48,2747.65 cw(c4818.61,2737.7) P3.11@4810.9,2775.36 ; 4789.65,2739.48 ccw(c4779.7,2776.61) P3.11@4817.36,2768.9 ; v2(4994,2357) 5067,2357 5436,1988 5436,1860 5391,1815 ; UART1.P2.3@5339,1815 5391,1815 ; 4044.3,3620 cw(c4044.3,3636.44) 4032.67,3624.82 ccw(c4044.3,3636.44) 4044.3,3620 ; 4044.3,3620 ccw(c4044.3,3603.56) 4032.67,3615.18 cw(c4044.3,3603.56) 4044.3,3620 ; 4124,3620 cw(c4118.29,3614.29) 4126.17,3612.53 ccw(c4118.29,3614.29) 4124,3620 ; 4124,3620 ccw(c4129.71,3625.71) 4131.47,3617.83 cw(c4129.71,3625.71) 4124,3620 ; 4169.95,2770.05 cw(c4181.9,2782) 4165,2782 ccw(c4181.9,2782) 4169.95,2770.05 ; 4169.95,2770.05 ccw(c4158,2758.1) 4158,2775 cw(c4158,2758.1) 4169.95,2770.05 ; 4770.13,2728.13 cw(c4812,2686.26) 4812,2745.47 ccw(c4812,2686.26) 4770.13,2728.13 ; 4770.13,2728.13 ccw(c4728.26,2770) 4787.47,2770 cw(c4728.26,2770) 4770.13,2728.13 ; 4787.2,2745.2 cw(c4812,2720.4) 4812,2755.47 ccw(c4812,2720.4) 4787.2,2745.2 ; 4787.2,2745.2 ccw(c4762.4,2770) 4797.47,2770 cw(c4762.4,2770) 4787.2,2745.2 ; 5010.9,2357 cw(c5010.9,2373.9) 4998.95,2361.95 ccw(c5010.9,2373.9) 5010.9,2357 ; 5010.9,2357 ccw(c5010.9,2340.1) 4998.95,2352.05 cw(c5010.9,2340.1) 5010.9,2357 ; 5369.8,1815 cw(c5369.8,1840.38) 5350.21,1824.24 ccw(c5369.8,1840.38) 5369.8,1815 ; 5369.8,1815 ccw(c5369.8,1789.62) 5350.21,1805.76 cw(c5369.8,1789.62) 5369.8,1815 ; 5391,1815 cw(c5391,1857.85) 5357.93,1830.6 ccw(c5391,1857.85) 5391,1815 ; 5391,1815 ccw(c5391,1772.15) 5357.93,1799.4 cw(c5391,1772.15) 5391,1815 ; 4094.37,3620 cw(c4094.37,3572.37) 4128.05,3606.05 ccw(c4094.37,3572.37) 4094.37,3620 ; 4118.51,3620 cw(c4118.51,3596.51) 4135.12,3613.12 ccw(c4118.51,3596.51) 4118.51,3620
  Bottom Layer w10: v2(4133,3611) 4186,3558 4186,2818 4158,2790 v2(4158,2782) ; P3.11@4806.64,2771.1 cw(c4844.3,2763.39) 4834.35,2800.52 ; P3.11@4812,2770 4855,2813 4935,2813 4994,2754 v2(4994,2357) ; P3.11@4813.1,2764.64 ccw(c4805.39,2802.3) 4842.52,2792.35 ; 4144.95,3599.05 cw(c4156.9,3611) 4140,3611 ccw(c4156.9,3611) 4144.95,3599.05 ; 4144.95,3599.05 ccw(c4133,3587.1) 4133,3604 cw(c4133,3587.1) 4144.95,3599.05 ; 4836.8,2794.8 cw(c4812,2819.6) 4812,2784.53 ccw(c4812,2819.6) 4836.8,2794.8 ; 4836.8,2794.8 ccw(c4861.6,2770) 4826.53,2770 cw(c4861.6,2770) 4836.8,2794.8 ; 4853.87,2811.87 cw(c4812,2853.74) 4812,2794.53 ccw(c4812,2853.74) 4853.87,2811.87 ; 4853.87,2811.87 ccw(c4895.74,2770) 4836.53,2770 cw(c4895.74,2770) 4853.87,2811.87 ; 4994,2373.9 cw(c4977.1,2373.9) 4989.05,2361.95 ccw(c4977.1,2373.9) 4994,2373.9 ; 4994,2373.9 ccw(c5010.9,2373.9) 4998.95,2361.95 cw(c5010.9,2373.9) 4994,2373.9 ; v2@4165,2782 cw(c4201.21,2782) 4175.61,2807.61 ccw(c4201.21,2782) v2@4165,2782
P0_17: P3.9 U1.61 | length 1007.2
  Top Layer w10: U1.61@4251.92,2724.41 4478.59,2724.41 4492,2711 4492,2710.75 4584.75,2618 4760,2618 P3.9@4812,2670 ; 4781.48,2647.65 cw(c4818.61,2637.7) P3.9@4810.9,2675.36 ; 4789.65,2639.48 ccw(c4779.7,2676.61) P3.9@4817.36,2668.9 ; 4770.13,2628.13 cw(c4812,2586.26) 4812,2645.47 ccw(c4812,2586.26) 4770.13,2628.13 ; 4770.13,2628.13 ccw(c4728.26,2670) 4787.47,2670 cw(c4728.26,2670) 4770.13,2628.13 ; 4787.2,2645.2 cw(c4812,2620.4) 4812,2655.47 ccw(c4812,2620.4) 4787.2,2645.2 ; 4787.2,2645.2 ccw(c4762.4,2670) 4797.47,2670 cw(c4762.4,2670) 4787.2,2645.2
P0_18: P3.8 U1.60 | length 812.1
  Top Layer w10: U1.60@4251.92,2704.72 4451.27,2704.72 4586,2570 P3.8@4712,2570 ; 4652.79,2570 cw(c4652.79,2510.79) 4694.66,2552.66 ccw(c4652.79,2510.79) 4652.79,2570 ; 4652.79,2570 ccw(c4652.79,2629.21) 4694.66,2587.34 cw(c4652.79,2629.21) 4652.79,2570 ; 4676.93,2570 cw(c4676.93,2534.93) 4701.73,2559.73 ccw(c4676.93,2534.93) 4676.93,2570 ; 4676.93,2570 ccw(c4676.93,2605.07) 4701.73,2580.27 cw(c4676.93,2605.07) 4676.93,2570
P0_19: LCD.20 P3.7 pad.EndPad@5362,2497 U1.59 | length 2497.9
  Top Layer w10: U1.59@4251.92,2685.04 4430.96,2685.04 4597,2519 4736,2519 ; 4772.61,2539.27 ccw(c4761.26,2605.99) P3.7@4816.46,2566.83 ; 4775.27,2549.52 ccw(c4767.38,2595.94) P3.7@4808.09,2572.28 ; 4796.41,2543.32 ccw(c4789.11,2586.23) P3.7@4824.62,2561.05 ; 5331.48,2519.35 ccw(c5368.61,2529.3) LCD.20@5360.9,2491.64 ; 5339.65,2527.52 cw(c5329.7,2490.39) LCD.20@5367.36,2498.1 ; pad.EndPad@5362,2497 5313,2546 5179,2546 5155,2570 4956,2570 4915,2570 P3.7@4812,2570 4787,2570 4736,2519 ; 4736,2519 cw(c4801.13,2453.87) 4809.71,2545.58 ccw(c4801.13,2453.87) 4736,2519 ; 4847.07,2570 cw(c4847.07,2605.07) 4822.27,2580.27 ccw(c4847.07,2605.07) 4847.07,2570 ; 4847.07,2570 ccw(c4847.07,2534.93) 4822.27,2559.73 cw(c4847.07,2534.93) 4847.07,2570 ; 4871.21,2570 cw(c4871.21,2629.21) 4829.34,2587.34 ccw(c4871.21,2629.21) 4871.21,2570 ; 4871.21,2570 ccw(c4871.21,2510.79) 4829.34,2552.66 cw(c4871.21,2510.79) 4871.21,2570 ; 5320.13,2538.87 cw(c5278.26,2497) 5337.47,2497 ccw(c5278.26,2497) 5320.13,2538.87 ; 5320.13,2538.87 ccw(c5362,2580.74) 5362,2521.53 cw(c5362,2580.74) 5320.13,2538.87 ; 5337.2,2521.8 cw(c5312.4,2497) 5347.47,2497 ccw(c5312.4,2497) 5337.2,2521.8 ; 5337.2,2521.8 ccw(c5362,2546.6) 5362,2511.53 cw(c5362,2546.6) 5337.2,2521.8 ; 4751.05,2534.05 cw(c4803.71,2481.39) 4810.65,2555.54 ccw(c4803.71,2481.39) 4751.05,2534.05 ; 4766.09,2549.09 cw(c4806.28,2508.9) 4811.58,2565.49 ccw(c4806.28,2508.9) 4766.09,2549.09 ; 4781.14,2564.14 cw(c4808.86,2536.42) 4812.51,2575.45 ccw(c4808.86,2536.42) 4781.14,2564.14
P0_20: LCD.4 P3.6 pad.EndPad@5362,3297 U1.58 | length 3353.5
  Top Layer w10: U1.58@4251.92,2665.36 4401.65,2665.36 4597,2470 P3.6@4712,2470 4726,2470 4775,2519 ; P3.6@4707.03,2472.29 cw(c4754.63,2450.39) 4742.84,2501.44 ; P3.6@4711.8,2464.53 ccw(c4712.85,2493.45) 4740.8,2485.96 ; P3.6@4716.36,2468.79 cw(c4746.18,2460.55) 4739.21,2490.69 ; LCD.4@5356.64,3295.9 ccw(c5394.3,3303.61) 5384.35,3266.48 ; pad.EndPad@5362,3297 5478,3181 5478,2525 5400,2447 5165,2447 5093,2519 4775,2519 ; LCD.4@5363.1,3302.36 cw(c5355.39,3264.7) 5392.52,3274.65 ; 4652.79,2470 cw(c4652.79,2410.79) 4694.66,2452.66 ccw(c4652.79,2410.79) 4652.79,2470 ; 4652.79,2470 ccw(c4652.79,2529.21) 4694.66,2487.34 cw(c4652.79,2529.21) 4652.79,2470 ; 4676.93,2470 cw(c4676.93,2434.93) 4701.73,2459.73 ccw(c4676.93,2434.93) 4676.93,2470 ; 4676.93,2470 ccw(c4676.93,2505.07) 4701.73,2480.27 cw(c4676.93,2505.07) 4676.93,2470 ; 4775,2519 cw(c4715.76,2578.23) 4712.85,2494.51 ccw(c4715.76,2578.23) 4775,2519 ; 5386.8,3272.2 cw(c5411.6,3297) 5376.53,3297 ccw(c5411.6,3297) 5386.8,3272.2 ; 5386.8,3272.2 ccw(c5362,3247.4) 5362,3282.47 cw(c5362,3247.4) 5386.8,3272.2 ; 5403.87,3255.13 cw(c5445.74,3297) 5386.53,3297 ccw(c5445.74,3297) 5403.87,3255.13 ; 5403.87,3255.13 ccw(c5362,3213.26) 5362,3272.47 cw(c5362,3213.26) 5403.87,3255.13 ; P3.6@4712.16,2474.52 ccw(c4713.58,2515.35) 4742.47,2486.47 cw(c4713.58,2515.35) P3.6@4712.16,2474.52 ; P3.6@4712.5,2484.52 ccw(c4714.67,2546.79) 4758.73,2502.73 cw(c4714.67,2546.79) P3.6@4712.5,2484.52 ; P3.6@4736.53,2470 cw(c4761.94,2470) 4743.97,2487.97 ccw(c4761.94,2470) P3.6@4736.53,2470
P0_21: LCD.2 P3.5 U1.57 | length 3542.1
  Top Layer w10: U1.57@4251.92,2645.67 4370.33,2645.67 4597,2419 4761,2419 P3.5@4812,2470 ; 4781.48,2447.65 cw(c4818.61,2437.7) P3.5@4810.9,2475.36 ; 4789.65,2439.48 ccw(c4779.7,2476.61) P3.5@4817.36,2468.9 ; v2(4912,2645) 5395,2645 5450,2700 v2(5450,3136) ; 4770.13,2428.13 cw(c4812,2386.26) 4812,2445.47 ccw(c4812,2386.26) 4770.13,2428.13 ; 4770.13,2428.13 ccw(c4728.26,2470) 4787.47,2470 cw(c4728.26,2470) 4770.13,2428.13 ; 4787.2,2445.2 cw(c4812,2420.4) 4812,2455.47 ccw(c4812,2420.4) 4787.2,2445.2 ; 4787.2,2445.2 ccw(c4762.4,2470) 4797.47,2470 cw(c4762.4,2470) 4787.2,2445.2 ; 4928.9,2645 cw(c4928.9,2661.9) 4916.95,2649.95 ccw(c4928.9,2661.9) 4928.9,2645 ; 4928.9,2645 ccw(c4928.9,2628.1) 4916.95,2640.05 cw(c4928.9,2628.1) 4928.9,2645 ; 5450,3119.1 cw(c5466.9,3119.1) 5454.95,3131.05 ccw(c5466.9,3119.1) 5450,3119.1 ; 5450,3119.1 ccw(c5433.1,3119.1) 5445.05,3131.05 cw(c5433.1,3119.1) 5450,3119.1
  Bottom Layer w10: P3.5@4806.64,2471.1 cw(c4844.3,2463.39) 4834.35,2500.52 ; P3.5@4812,2470 4912,2570 v2(4912,2645) ; P3.5@4813.1,2464.64 ccw(c4805.39,2502.3) 4842.52,2492.35 ; LCD.2@5356.64,3395.9 ccw(c5394.3,3403.61) 5384.35,3366.48 ; LCD.2@5362,3397 5450,3309 v2(5450,3136) ; LCD.2@5363.1,3402.36 cw(c5355.39,3364.7) 5392.52,3374.65 ; 4836.8,2494.8 cw(c4812,2519.6) 4812,2484.53 ccw(c4812,2519.6) 4836.8,2494.8 ; 4836.8,2494.8 ccw(c4861.6,2470) 4826.53,2470 cw(c4861.6,2470) 4836.8,2494.8 ; 4853.87,2511.87 cw(c4812,2553.74) 4812,2494.53 ccw(c4812,2553.74) 4853.87,2511.87 ; 4853.87,2511.87 ccw(c4895.74,2470) 4836.53,2470 cw(c4895.74,2470) 4853.87,2511.87 ; 4912,2628.1 cw(c4928.9,2628.1) 4916.95,2640.05 ccw(c4928.9,2628.1) 4912,2628.1 ; 4912,2628.1 ccw(c4895.1,2628.1) 4907.05,2640.05 cw(c4895.1,2628.1) 4912,2628.1 ; 5386.8,3372.2 cw(c5411.6,3397) 5376.53,3397 ccw(c5411.6,3397) 5386.8,3372.2 ; 5386.8,3372.2 ccw(c5362,3347.4) 5362,3382.47 cw(c5362,3347.4) 5386.8,3372.2 ; 5403.87,3355.13 cw(c5445.74,3397) 5386.53,3397 ccw(c5445.74,3397) 5403.87,3355.13 ; 5403.87,3355.13 ccw(c5362,3313.26) 5362,3372.47 cw(c5362,3313.26) 5403.87,3355.13 ; 5450,3152.9 cw(c5433.1,3152.9) 5445.05,3140.95 ccw(c5433.1,3152.9) 5450,3152.9 ; 5450,3152.9 ccw(c5466.9,3152.9) 5454.95,3140.95 cw(c5466.9,3152.9) 5450,3152.9
P0_22: LCD.10 P3.4 U1.56 | length 3100.5
  Top Layer w10: U1.56@4251.92,2625.99 4332.02,2625.99 4588,2370 P3.4@4712,2370 ; v2(4916,2421) 5095,2421 v2(5154,2362) ; 4652.79,2370 cw(c4652.79,2310.79) 4694.66,2352.66 ccw(c4652.79,2310.79) 4652.79,2370 ; 4652.79,2370 ccw(c4652.79,2429.21) 4694.66,2387.34 cw(c4652.79,2429.21) 4652.79,2370 ; 4676.93,2370 cw(c4676.93,2334.93) 4701.73,2359.73 ccw(c4676.93,2334.93) 4676.93,2370 ; 4676.93,2370 ccw(c4676.93,2405.07) 4701.73,2380.27 cw(c4676.93,2405.07) 4676.93,2370 ; 4932.9,2421 cw(c4932.9,2437.9) 4920.95,2425.95 ccw(c4932.9,2437.9) 4932.9,2421 ; 4932.9,2421 ccw(c4932.9,2404.1) 4920.95,2416.05 cw(c4932.9,2404.1) 4932.9,2421 ; 5142.05,2373.95 cw(c5130.1,2362) 5147,2362 ccw(c5130.1,2362) 5142.05,2373.95 ; 5142.05,2373.95 ccw(c5154,2385.9) 5154,2369 cw(c5154,2385.9) 5142.05,2373.95
  Bottom Layer w10: P3.4@4706.64,2371.1 cw(c4744.3,2363.39) 4734.35,2400.52 ; P3.4@4712,2370 4763,2421 v2(4916,2421) ; P3.4@4713.1,2364.64 ccw(c4705.39,2402.3) 4742.52,2392.35 ; v2(5154,2362) 5154,2882 5221,2949 5314,2949 LCD.10@5362,2997 ; 5331.48,2974.65 cw(c5368.61,2964.7) LCD.10@5360.9,3002.36 ; 5339.65,2966.48 ccw(c5329.7,3003.61) LCD.10@5367.36,2995.9 ; 4736.8,2394.8 cw(c4712,2419.6) 4712,2384.53 ccw(c4712,2419.6) 4736.8,2394.8 ; 4736.8,2394.8 ccw(c4761.6,2370) 4726.53,2370 cw(c4761.6,2370) 4736.8,2394.8 ; 4753.87,2411.87 cw(c4712,2453.74) 4712,2394.53 ccw(c4712,2453.74) 4753.87,2411.87 ; 4753.87,2411.87 ccw(c4795.74,2370) 4736.53,2370 cw(c4795.74,2370) 4753.87,2411.87 ; 4899.1,2421 cw(c4899.1,2404.1) 4911.05,2416.05 ccw(c4899.1,2404.1) 4899.1,2421 ; 4899.1,2421 ccw(c4899.1,2437.9) 4911.05,2425.95 cw(c4899.1,2437.9) 4899.1,2421 ; 5154,2378.9 cw(c5137.1,2378.9) 5149.05,2366.95 ccw(c5137.1,2378.9) 5154,2378.9 ; 5154,2378.9 ccw(c5170.9,2378.9) 5158.95,2366.95 cw(c5170.9,2378.9) 5154,2378.9 ; 5320.13,2955.13 cw(c5362,2913.26) 5362,2972.47 ccw(c5362,2913.26) 5320.13,2955.13 ; 5320.13,2955.13 ccw(c5278.26,2997) 5337.47,2997 cw(c5278.26,2997) 5320.13,2955.13 ; 5337.2,2972.2 cw(c5362,2947.4) 5362,2982.47 ccw(c5362,2947.4) 5337.2,2972.2 ; 5337.2,2972.2 ccw(c5312.4,2997) 5347.47,2997 cw(c5312.4,2997) 5337.2,2972.2
P0_23: LCD.8 P1.9 U1.9 | length 9453
  Top Layer w10: v2(1923,4115) 1855,4047 1855,2923 2011,2767 2011,2765 2088,2765 ; 2073.02,2761.19 ccw(c2085.33,2782.52) v2@2095.97,2760.31 ; 2086.08,2764.8 cw(c2080.16,2754.54) v2@2092,2754.2 ; v2(2099,2754) 2088,2765 ; P1.9@2176.64,2821.1 cw(c2214.3,2813.39) 2204.35,2850.52 ; P1.9@2182,2820 2234,2872 2372,2872 2608,3108 3110,3108 3375.48,2842.52 U1.9@3622,2842.52 ; P1.9@2183.1,2814.64 ccw(c2175.39,2852.3) 2212.52,2842.35 ; 1911.05,4103.05 cw(c1923,4091.1) 1923,4108 ccw(c1923,4091.1) 1911.05,4103.05 ; 1911.05,4103.05 ccw(c1899.1,4115) 1916,4115 cw(c1899.1,4115) 1911.05,4103.05 ; 2088,2765 cw(c2078.25,2755.25) 2092.01,2754.42 ccw(c2078.25,2755.25) 2088,2765 ; 2088,2765 ccw(c2097.75,2774.75) 2098.58,2760.99 cw(c2097.75,2774.75) 2088,2765 ; 2206.8,2844.8 cw(c2182,2869.6) 2182,2834.53 ccw(c2182,2869.6) 2206.8,2844.8 ; 2206.8,2844.8 ccw(c2231.6,2820) 2196.53,2820 cw(c2231.6,2820) 2206.8,2844.8 ; 2223.87,2861.87 cw(c2182,2903.74) 2182,2844.53 ccw(c2182,2903.74) 2223.87,2861.87 ; 2223.87,2861.87 ccw(c2265.74,2820) 2206.53,2820 cw(c2265.74,2820) 2223.87,2861.87 ; 2055.54,2765 cw(c2055.54,2710.54) 2094.05,2749.05 ccw(c2055.54,2710.54) 2055.54,2765 ; 2079.69,2765 cw(c2079.69,2734.69) 2101.12,2756.12 ccw(c2079.69,2734.69) 2079.69,2765
  Bottom Layer w10: v2(1923,4115) 2017,4209 4962,4209 5065.5,4105.5 5065.5,3244.5 5165,3145 5314,3145 LCD.8@5362,3097 ; v2(2099,2754) 2116,2754 P1.9@2182,2820 ; v2@2105.06,2750.5 cw(c2139.69,2730.51) 2129.34,2769.13 ; 2151.48,2797.65 cw(c2188.61,2787.7) P1.9@2180.9,2825.36 ; 2159.65,2789.48 ccw(c2149.7,2826.61) P1.9@2187.36,2818.9 ; 5331.48,3119.35 ccw(c5368.61,3129.3) LCD.8@5360.9,3091.64 ; 5339.65,3127.52 cw(c5329.7,3090.39) LCD.8@5367.36,3098.1 ; 1934.95,4126.95 cw(c1923,4138.9) 1923,4122 ccw(c1923,4138.9) 1934.95,4126.95 ; 1934.95,4126.95 ccw(c1946.9,4115) 1930,4115 cw(c1946.9,4115) 1934.95,4126.95 ; 2115.9,2754 cw(c2115.9,2770.9) 2103.95,2758.95 ccw(c2115.9,2770.9) 2115.9,2754 ; 2115.9,2754 ccw(c2115.9,2737.1) 2103.95,2749.05 cw(c2115.9,2737.1) 2115.9,2754 ; 2140.13,2778.13 cw(c2182,2736.26) 2182,2795.47 ccw(c2182,2736.26) 2140.13,2778.13 ; 2140.13,2778.13 ccw(c2098.26,2820) 2157.47,2820 cw(c2098.26,2820) 2140.13,2778.13 ; 2157.2,2795.2 cw(c2182,2770.4) 2182,2805.47 ccw(c2182,2770.4) 2157.2,2795.2 ; 2157.2,2795.2 ccw(c2132.4,2820) 2167.47,2820 cw(c2132.4,2820) 2157.2,2795.2 ; 5320.13,3138.87 cw(c5278.26,3097) 5337.47,3097 ccw(c5278.26,3097) 5320.13,3138.87 ; 5320.13,3138.87 ccw(c5362,3180.74) 5362,3121.53 cw(c5362,3180.74) 5320.13,3138.87 ; 5337.2,3121.8 cw(c5312.4,3097) 5347.47,3097 ccw(c5312.4,3097) 5337.2,3121.8 ; 5337.2,3121.8 ccw(c5362,3146.6) 5362,3111.53 cw(c5362,3146.6) 5337.2,3121.8 ; v2@2099,2751 ccw(c2099,2784.8) 2122.9,2760.9 cw(c2099,2784.8) v2@2099,2751 ; v2@2099,2761 ccw(c2099,2818.94) 2139.97,2777.97 cw(c2099,2818.94) v2@2099,2761
P0_24: P1.8 U1.8 | length 1836.6
  Top Layer w10: P1.8@2282,2920 2365,2920 2578,3133 3131,3133 3401.8,2862.2 U1.8@3622,2862.2 ; 2317.07,2920 cw(c2317.07,2955.07) 2292.27,2930.27 ccw(c2317.07,2955.07) 2317.07,2920 ; 2317.07,2920 ccw(c2317.07,2884.93) 2292.27,2909.73 cw(c2317.07,2884.93) 2317.07,2920 ; 2341.21,2920 cw(c2341.21,2979.21) 2299.34,2937.34 ccw(c2341.21,2979.21) 2341.21,2920 ; 2341.21,2920 ccw(c2341.21,2860.79) 2299.34,2902.66 cw(c2341.21,2860.79) 2341.21,2920
P0_25: P1.7 pad.StartPad@5119,1915 U1.7 UART2&3.P3.8 | length 5626.4
  Top Layer w10: P1.7@2176.64,2921.1 cw(c2214.3,2913.39) 2204.35,2950.52 ; P1.7@2182,2920 2233,2971 2343,2971 2530,3158 3155,3158 v2(3423,2890) ; P1.7@2183.1,2914.64 ccw(c2175.39,2952.3) 2212.52,2942.35 ; v2@3425,2881.89 U1.7@3622,2881.89 ; v2@3427.16,2884.37 cw(c3436.61,2871.6) 3444.56,2885.36 ; v1(4443,2245) 4443,2244.49 4546.49,2141 4893,2141 pad.StartPad@5119,1915 ; 5088.48,1937.35 ccw(c5125.61,1947.3) UART2&3.P3.8@5117.9,1909.64 ; 5096.65,1945.52 cw(c5086.7,1908.39) UART2&3.P3.8@5124.36,1916.1 ; 2206.8,2944.8 cw(c2182,2969.6) 2182,2934.53 ccw(c2182,2969.6) 2206.8,2944.8 ; 2206.8,2944.8 ccw(c2231.6,2920) 2196.53,2920 cw(c2231.6,2920) 2206.8,2944.8 ; 2223.87,2961.87 cw(c2182,3003.74) 2182,2944.53 ccw(c2182,3003.74) 2223.87,2961.87 ; 2223.87,2961.87 ccw(c2265.74,2920) 2206.53,2920 cw(c2265.74,2920) 2223.87,2961.87 ; 3411.05,2901.95 cw(c3399.1,2890) 3416,2890 ccw(c3399.1,2890) 3411.05,2901.95 ; 3411.05,2901.95 ccw(c3423,2913.9) 3423,2897 cw(c3423,2913.9) 3411.05,2901.95 ; 5077.13,1956.87 cw(c5035.26,1915) 5094.47,1915 ccw(c5035.26,1915) 5077.13,1956.87 ; 5077.13,1956.87 ccw(c5119,1998.74) 5119,1939.53 cw(c5119,1998.74) 5077.13,1956.87 ; 5094.2,1939.8 cw(c5069.4,1915) 5104.47,1915 ccw(c5069.4,1915) 5094.2,1939.8 ; 5094.2,1939.8 ccw(c5119,1964.6) 5119,1929.53 cw(c5119,1964.6) 5094.2,1939.8 ; v2@3420.88,2887.88 ccw(c3435.34,2902.34) 3435.34,2881.89 cw(c3435.34,2902.34) v2@3420.88,2887.88 ; v2@3427.95,2894.95 ccw(c3459.48,2926.48) 3459.48,2881.89 cw(c3459.48,2926.48) v2@3427.95,2894.95 ; v1@4443,2237.5 cw(c4443,2220.61) 4454.94,2232.55 ccw(c4443,2220.61) v1@4443,2237.5 ; v1@4450.5,2245 ccw(c4469.83,2245) 4456.16,2231.33 cw(c4469.83,2245) v1@4450.5,2245
  Bottom Layer w10: v2@3419,2894 3244,2894 3156,2806 3156,2381 3292,2245 v1(4443,2245) ; 4424.89,2245 cw(c4424.89,2226.89) 4437.7,2239.7 ccw(c4424.89,2226.89) 4424.89,2245 ; 4424.89,2245 ccw(c4424.89,2263.11) 4437.7,2250.3 cw(c4424.89,2263.11) 4424.89,2245 ; 3396.44,2894 cw(c3396.44,2863.44) 3418.05,2885.05 ccw(c3396.44,2863.44) 3396.44,2894
P0_26: P1.6 pad.StartPad@5119,1815 U1.6 UART2&3.P3.6 | length 5835.1
  Top Layer w10: P1.6@2282,3020 2327,3020 ; 3588.18,2901.26 3453.74,2901.26 3173,3182 2489,3182 2327,3020 ; U1.6@3622,2901.57 3678.43,2901.57 v2(3695,2885) ; v1(4438.75,2187.75) 4535.49,2091 4837,2091 5113,1815 pad.StartPad@5119,1815 ; v1@4438.81,2180.25 cw(c4438.95,2162.63) 4451.55,2174.94 ; v1@4438.94,2180.25 cw(c4439.36,2163.63) 4451.26,2175.25 cw(c4462.87,2187.13) v1@4446.24,2187.56 ; v1@4446.25,2187.69 ccw(c4463.86,2187.54) 4451.55,2174.94 ; 5089.22,1834.61 ccw(c5122.13,1843.43) UART2&3.P3.6@5118.4,1809.56 ; 5093.92,1846.25 cw(c5082.72,1804.48) UART2&3.P3.6@5124.26,1816.52 ; 2327,3020 cw(c2327,3049.01) 2302.61,3033.29 ccw(c2327,3049.01) 2327,3020 ; 2327,3020 ccw(c2327,2990.99) 2302.61,3006.71 cw(c2327,2990.99) 2327,3020 ; 3683.05,2896.95 cw(c3671.1,2885) 3688,2885 ccw(c3671.1,2885) 3683.05,2896.95 ; 3683.05,2896.95 ccw(c3695,2908.9) 3695,2892 cw(c3695,2908.9) 3683.05,2896.95 ; 4451.19,2175.31 cw(c4463.62,2187.45) 4446.25,2187.66 ccw(c4463.62,2187.45) 4451.19,2175.31 ; 4451.18,2175.3 ccw(c4439.04,2162.87) 4438.84,2180.25 cw(c4439.04,2162.87) 4451.18,2175.3 ; 4451.55,2174.94 cw(c4464.35,2187.75) 4446.25,2187.75 ccw(c4464.35,2187.75) 4451.55,2174.94 ; 4451.55,2174.94 ccw(c4438.75,2162.14) 4438.75,2180.25 cw(c4438.75,2162.14) 4451.55,2174.94 ; pad.StartPad@5119,1815 cw(c5119,1829.49) 5108.76,1819.24 ccw(c5119,1829.49) pad.StartPad@5119,1815 ; 5066.89,1861.11 ccw(c5119,1913.23) 5119,1839.53 cw(c5119,1913.23) 5066.89,1861.11 ; 5081.37,1846.63 cw(c5049.74,1815) 5094.47,1815 ccw(c5049.74,1815) 5081.37,1846.63 ; 5083.96,1844.04 ccw(c5119,1879.09) 5119,1829.53 cw(c5119,1879.09) 5083.96,1844.04
  Bottom Layer w10: v2(3695,2885) 3679,2901 3514,2901 3469,2946 3193,2946 3063,2816 3063,2362 3237.25,2187.75 v1(4438.75,2187.75) ; 3683.05,2896.95 cw(c3671.1,2885) 3688,2885 ccw(c3671.1,2885) 3683.05,2896.95 ; 3683.05,2896.95 ccw(c3695,2908.9) 3695,2892 cw(c3695,2908.9) 3683.05,2896.95 ; 4420.64,2187.75 cw(c4420.64,2169.64) 4433.44,2182.44 ccw(c4420.64,2169.64) 4420.64,2187.75 ; 4420.64,2187.75 ccw(c4420.64,2205.85) 4433.44,2193.05 cw(c4420.64,2205.85) 4420.64,2187.75
P0_27: P1.22 U1.25 | length 1959.6
  Top Layer w10: P1.22@2282,2220 2282,2168 ; U1.25@3622,2527.56 3598.56,2527.56 3024,1953 2497,1953 2282,2168 ; 2282,2168 cw(c2324.85,2168) 2297.6,2201.07 ccw(c2324.85,2168) 2282,2168 ; 2282,2168 ccw(c2239.15,2168) 2266.4,2201.07 cw(c2239.15,2168) 2282,2168 ; 2282,2189.2 cw(c2307.38,2189.2) 2291.24,2208.79 ccw(c2307.38,2189.2) 2282,2189.2 ; 2282,2189.2 ccw(c2256.62,2189.2) 2272.76,2208.79 cw(c2256.62,2189.2) 2282,2189.2